# Altium PCB IQ解调器PCB.PcbDoc
Units mil, origin at the board's own origin, x right, y up, seen from the top; angles counter-clockwise.
Board outline 3240 x 3145 mil, 2 copper layers (Top Layer, Bottom Layer); 137 components, 72 nets, 371 pads, 1320 vias.
Unrouted connection lines stored in the file: 2.
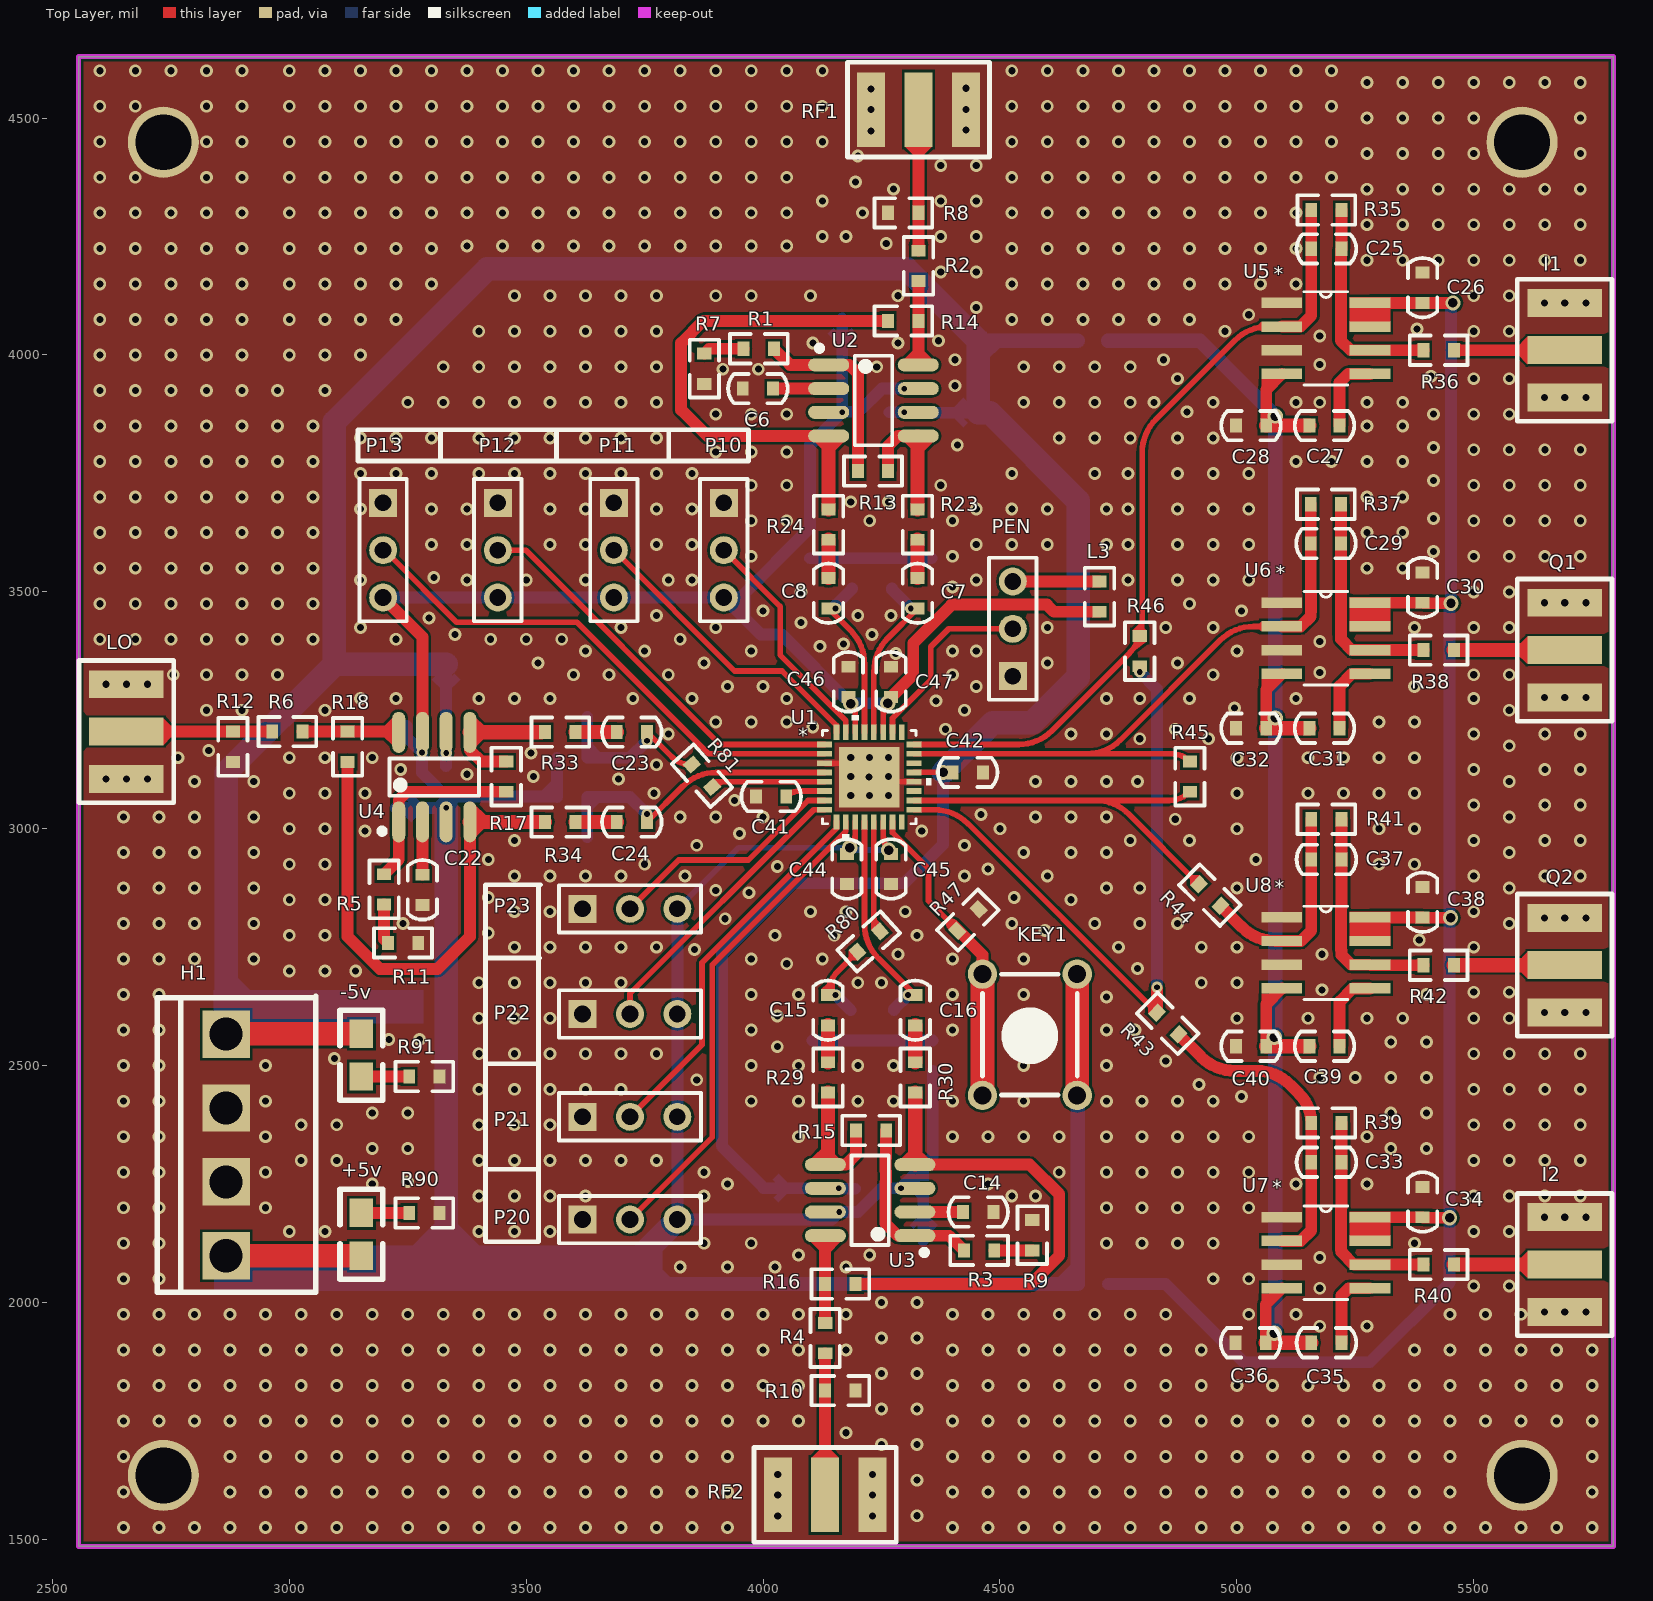
[diagram p0: Top Layer view]
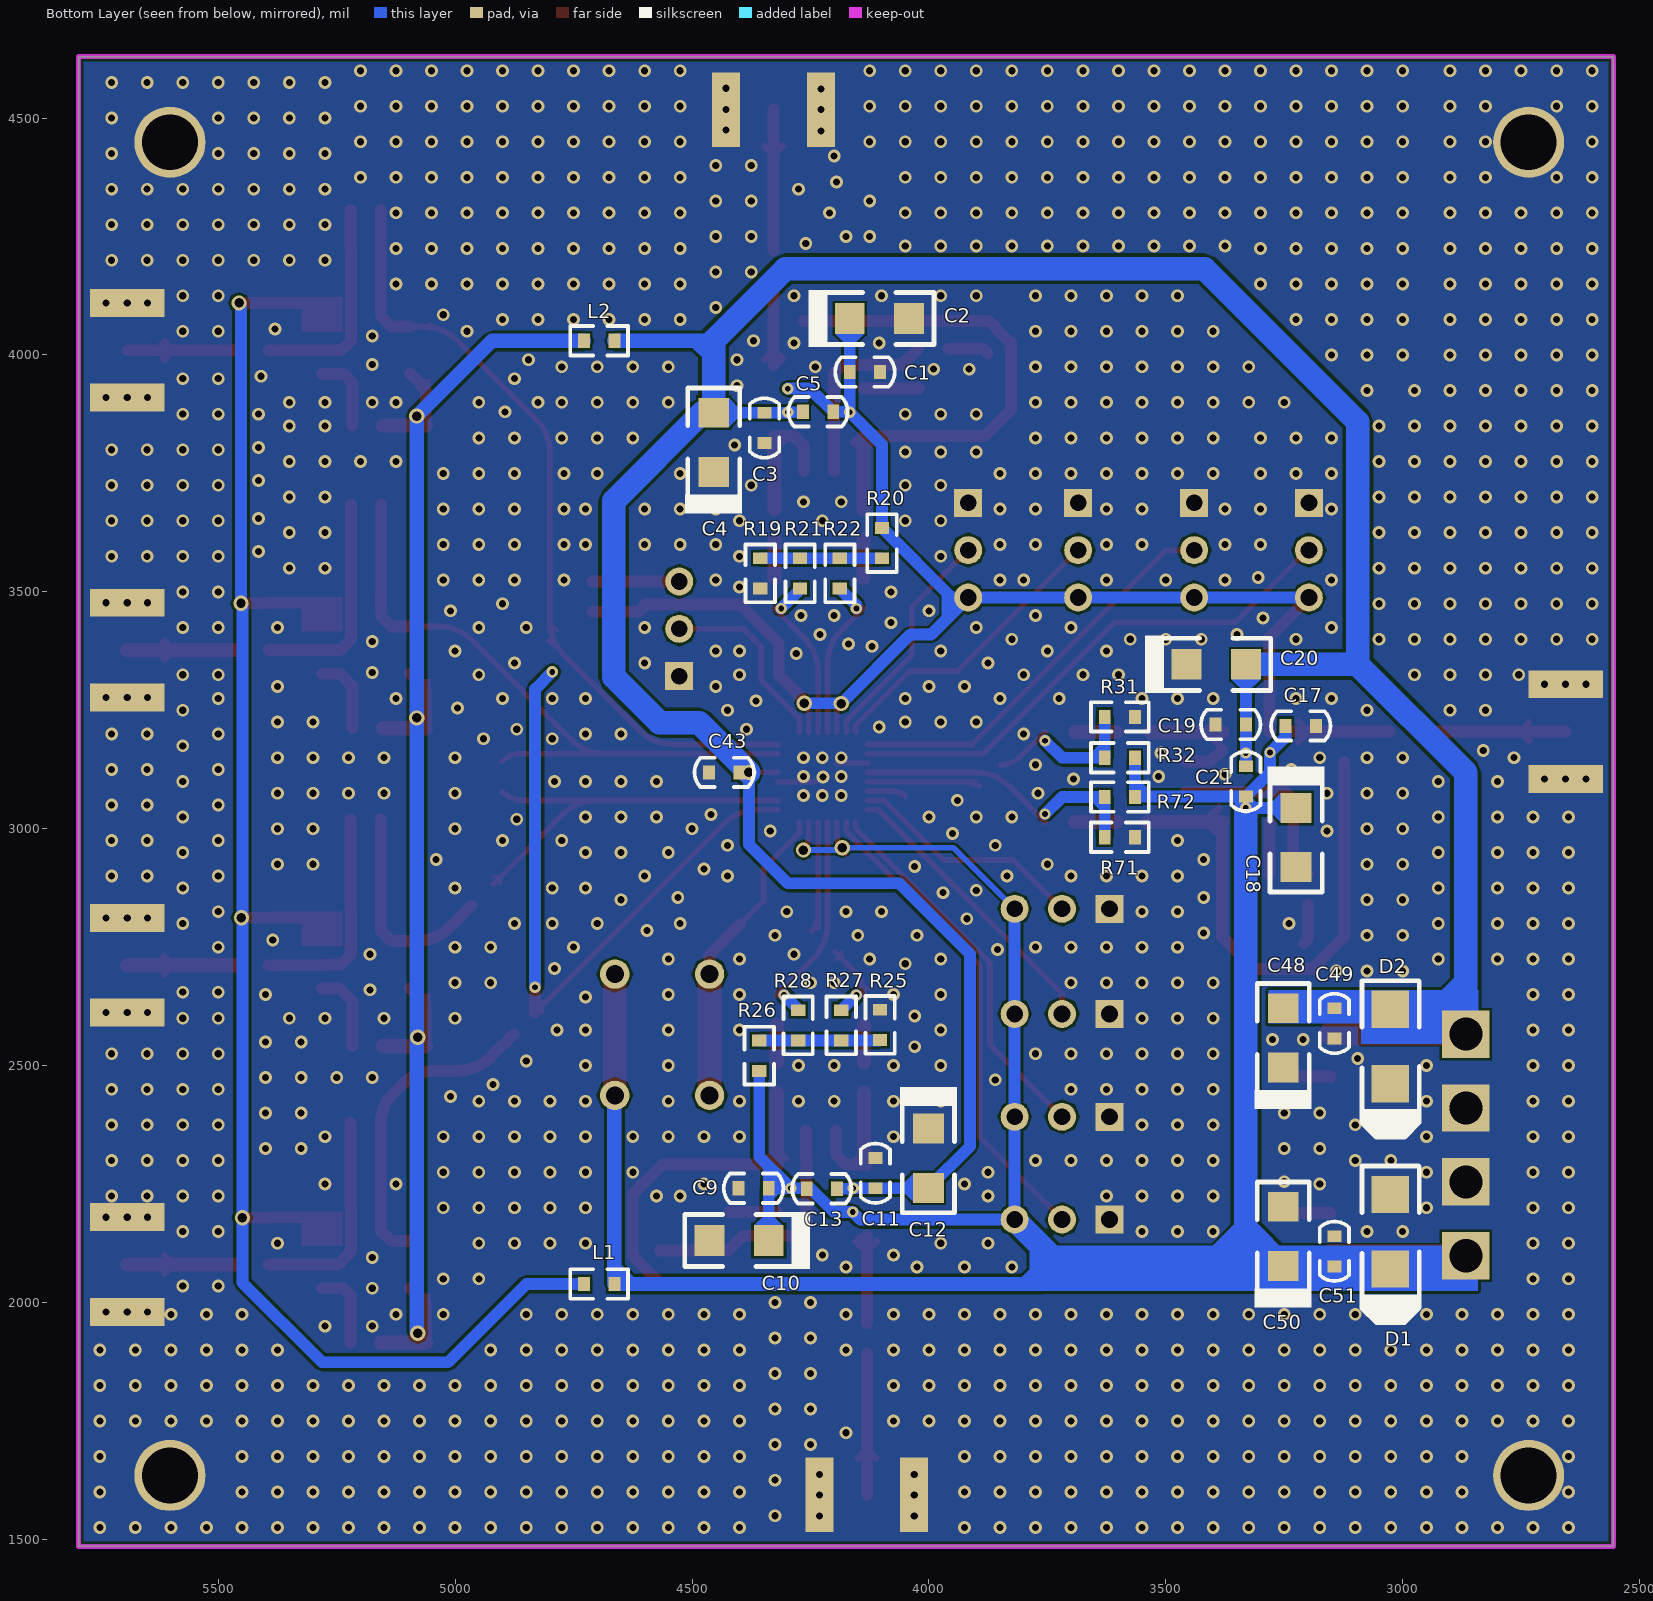
[diagram p1: Bottom Layer view, seen from below]

## Layer stack, top to bottom
Top Solder: solder mask 0.4, Solder Resist, Dk 3.5
Top Layer: signal copper 1.4
Dielectric 1: dielectric 12.6, FR-4, Dk 4.8
Bottom Layer: signal copper 1.4
Bottom Solder: solder mask 0.4, Solder Resist, Dk 3.5

## Board outline
2555,1485 2555,4630 5795,4630 5795,1485

## Design rules (kind name [scope] priority, off if disabled: settings)
Clearance [All] p1: gap=5
PolygonConnect [All] p1: connectstyle=Direct reliefconductorwidth=10 reliefentries=4 polygonreliefangle="90 Angle" airgapwidth=10
RoutingVias [All] p1: holewidth=28 width=50 viastyle="Through Hole" minholewidth=28 minwidth=50 maxholewidth=28 maxwidth=50
SolderMaskExpansion [All] p1: expansion=4
Width [All] p1: maxlimit=60 minlimit=6 preferedwidth=10
30 further rules are at their usual default settings.

## Components (designator, comment, footprint, x,y, rotation, side; value= is the part's Value field where it differs from the comment)
+5v "LED" 0805 3152,2099 r90 top
-5v "LED" 0805 3152,2477 r90 top
C1 "Cap" 0603C 4103,3964 r0 bottom
C2 "10uf" 3216C-TYPE_A 4167,4077 r0 bottom
C3 "Cap" 0603C 4347,3878 r270 bottom
C4 "10uf" 3216C-TYPE_A 4454,3753 r270 bottom
C5 "Cap" 0603C 4266,3880 r180 bottom
C6 "Cap" 0603C 3957,3929 r0 top
C7 "Cap" 0603C 4326,3529 r270 top
C8 "Cap" 0603C 4138,3529 r270 top
C9 "Cap" 0603C 4402,2241 r180 bottom
C10 "10uf" 3216C-TYPE_A 4338,2131 r180 bottom
C11 "Cap" 0603C 4113,2241 r90 bottom
C12 "10uf" 3216C-TYPE_A 4001,2367 r90 bottom
C13 "Cap" 0603C 4194,2240 r0 bottom
C14 "Cap" 0603C 4486,2191 r180 top
C15 "Cap" 0603C 4137,2585 r90 top
C16 "Cap" 0603C 4321,2585 r90 top
C17 "Cap" 0603C 3183,3217 r0 bottom
C18 "10uf" 3216C-TYPE_A 3225,3044 r90 bottom
C19 "Cap" 0603C 3331,3220 r0 bottom
C20 "10uf" 3216C-TYPE_A 3456,3347 r0 bottom
C21 "Cap" 0603C 3331,3132 r270 bottom
C22 "Cap" 0603C 3281,2839 r90 top
C23 "Cap" 0603C 3691,3204 r0 top
C24 "Cap" 0603C 3691,3014 r0 top
C25 "Cap" 0603C 5157,4224 r0 top
C26 "Cap" 0603C 5392,4174 r270 top
C27 "Cap" 0603C 5217,3851 r180 top
C28 "Cap" 0603C 4998,3851 r0 top
C29 "Cap" 0603C 5156,3602 r0 top
C30 "Cap" 0603C 5392,3541 r270 top
C31 "Cap" 0603C 5217,3212 r180 top
C32 "Cap" 0603C 4998,3212 r0 top
C33 "Cap" 0603C 5157,2296 r0 top
C34 "Cap" 0603C 5392,2244 r270 top
C35 "Cap" 0603C 5221,1915 r180 top
C36 "Cap" 0603C 4997,1915 r0 top
C37 "Cap" 0603C 5157,2935 r0 top
C38 "Cap" 0603C 5392,2877 r270 top
C39 "Cap" 0603C 5217,2541 r180 top
C40 "Cap" 0603C 4998,2541 r0 top
C41 "Cap" 0603C 3985,3068 r0 top
C42 "Cap" 0603C 4400,3119 r0 top
C43 "Cap" 0603C 4400,3119 r0 bottom
C44 "Cap" 0603C 4177,2883 r90 top
C45 "Cap" 0603C 4270,2883 r90 top
C46 "Cap" 0603C 4180,3342 r270 top
C47 "Cap" 0603C 4270,3342 r270 top
C48 "10uf" 3216C-TYPE_A 3252,2496 r270 bottom
C49 "Cap" 0603C 3144,2557 r90 bottom
C50 "10uf" 3216C-TYPE_A 3252,2077 r270 bottom
C51 "Cap" 0603C 3144,2076 r90 bottom
D1 "5.6V" SMA/DO-214AC 3026,2228 r270 bottom
D2 "5.6V" SMA/DO-214AC 3026,2619 r270 bottom
H1 "VH3.96-4A" VH3.96-4P 2721,2022 r90 top
I1 "SMA" SMA-2 5692,4010 r90 top
I2 "SMA" SMA-2 5692,2080 r90 top
KEY1 "KEY_M" KEY_M 4663,2693 r270 top
L1 "120nH" 0603R 4696,2039 r0 bottom
L2 "120nH" 0603R 4696,4030 r0 bottom
L3 "120nH" 0603R 4710,3490 r270 top
LO "SMA" SMA-2 2656,3205 r270 top
P10 "Header 3" HDR3X1_A 3917,3688 r270 top
P11 "Header 3" HDR3X1_A 3685,3688 r270 top
P12 "Header 3" HDR3X1_A 3440,3688 r270 top
P13 "Header 3" HDR3X1_A 3198,3688 r270 top
P20 "Header 3" HDR3X1_A 3619,2175 r0 top
P21 "Header 3" HDR3X1_A 3619,2392 r0 top
P22 "Header 3" HDR3X1_A 3619,2609 r0 top
P23 "Header 3" HDR3X1_A 3619,2831 r0 top
PEN "Header 3" HDR3X1_A 4527,3322 r90 top
Q1 "SMA" SMA-2 5692,3377 r90 top
Q2 "SMA" SMA-2 5692,2712 r90 top
R1 "Res1" 0603R 3991,4013 r0 top
R2 "Res1" 0603R 4328,4188 r270 top
R3 "Res1" 0603R 4455.84,2110 r180 top
R4 "Res1" 0603R 4131,1925 r90 top
R5 "Res1" 0603R 3200,2872 r90 top
R6 "Res1" 0603R 2996,3205 r0 top
R7 "Res1" 0603R 3876,3971 r270 top
R8 "Res1" 0603R 4296,4300 r0 top
R9 "Res1" 0603R 4568,2142 r90 top
R10 "Res1" 0603R 4163,1814 r180 top
R11 "Res1" 0603R 3240,2759 r0 top
R12 "Res1" 0603R 2881,3173 r90 top
R13 "Res1" 0603R 4232,3755 r0 top
R14 "Res1" 0603R 4296,4072 r180 top
R15 "Res1" 0603R 4228,2363 r180 top
R16 "Res1" 0603R 4163,2039 r0 top
R17 "Res1" 0603R 3458,3110 r90 top
R18 "Res1" 0603R 3123,3173 r270 top
R19 "Res1" 0603R 4356,3539 r270 bottom
R20 "Res1" 0603R 4099,3603 r270 bottom
R21 "Res1" 0603R 4272,3539 r90 bottom
R22 "Res1" 0603R 4188,3539 r270 bottom
R23 "(DNM)" 0603R 4326,3642 r270 top
R24 "(DNM)" 0603R 4138,3642 r270 top
R25 "Res1" 0603R 4103,2586 r90 bottom
R26 "Res1" 0603R 4358,2521 r90 bottom
R27 "Res1" 0603R 4185,2585 r270 bottom
R28 "Res1" 0603R 4276,2585 r90 bottom
R29 "(DNM)" 0603R 4137,2475 r90 top
R30 "(DNM)" 0603R 4321,2475 r90 top
R31 "Res1" 0603R 3597,3236 r180 bottom
R32 "Res1" 0603R 3597,3150 r0 bottom
R33 "(DNM)" 0603R 3572,3204 r0 top
R34 "(DNM)" 0603R 3572,3014 r0 top
R35 "Res1" 0603R 5189,4306 r0 top
R36 "Res1" 0603R 5426,4010 r0 top
R37 "Res1" 0603R 5188,3685 r0 top
R38 "Res1" 0603R 5426,3377 r0 top
R39 "Res1" 0603R 5189,2379 r0 top
R40 "Res1" 0603R 5426,2080 r0 top
R41 "Res1" 0603R 5189,3020 r0 top
R42 "Res1" 0603R 5426,2712 r0 top
R43 "Res1" 0603R 4854,2589 r315 top
R44 "Res1" 0603R 4943,2860 r315 top
R45 "Res1" 0603R 4901,3110 r270 top
R46 "Res1" 0603R 4795,3375 r270 top
R47 "Res1" 0603R 4432.37,2807.37 r225 top
R71 "Res1" 0603R 3597,2982 r180 bottom
R72 "Res1" 0603R 3597,3067 r0 bottom
R80 "Comment" 0603R 4223,2762 r42 top
R81 "Comment" 0603R 3871,3112 r132 top
R90 "Res1" 0603R 3285,2189 r180 top
R91 "Res1" 0603R 3285,2477 r180 top
RF1 "SMA" SMA-2 4328,4518 r180 top
RF2 "SMA" SMA-2 4131,1594 r0 top
U1 "AD8333ACPZ_REEL" CP_32_2 4224,3109 r0 top
U2 "LMH6552_NGS_8" LC-SOIC-8_150mil 4233,3904 r270 top
U3 "LMH6552_NGS_8" LC-SOIC-8_150mil 4226,2216 r90 top
U4 "LMH6552_NGS_8" LC-SOIC-8_150mil 3306,3109 r0 top
U5 "AD8021AR" R_8 5188,4035 r0 top
U6 "AD8021AR" R_8 5188,3402 r0 top
U7 "AD8021AR" R_8 5188,2105 r0 top
U8 "AD8021AR" R_8 5188,2738 r0 top

## Footprints (in the part's own frame and the unit in brackets; to place one, negate y for a bottom-side part, rotate by r counter-clockwise, add the part's x,y. Pads: shape width x height; smd on the part's side, far side on the other; paste and mask are expansions set on the pad)
0603C [mil]
  rect 25x30 smd: 1(0,0) 2(64,0)
  silkscreen extent -31,-31 95,31
0603R [mil]
  rect 25x30 smd: 1(-32,0) 2(32,0)
  silkscreen extent -61,-31 61,31
0805 [mil]
  rect 60x50 smd: 1(0,0) 2(90,0)
  silkscreen extent -50,-45 140,45
3216C-TYPE_A [mm]
  rect 1.6x1.65 smd: 1(0,0) 2(-3.175,0)
  silkscreen extent -4.51,-1.54 2.22,1.52
CP_32_2 [mil]
  rect 32x12 smd mask+5: 1(-94.5,68.9) 2(-94.5,49.21) 3(-94.5,29.53) 4(-94.5,9.84) 5(-94.5,-9.84) 6(-94.5,-29.53) 7(-94.5,-49.21) 8(-94.5,-68.9) 17(94.5,-68.9) 18(94.5,-49.21) 19(94.5,-29.53) 20(94.5,-9.84) 21(94.5,9.84) 22(94.5,29.53) 23(94.5,49.21) 24(94.5,68.9)
  rect 12x32 smd mask+5: 9(-68.9,-94.5) 10(-49.21,-94.5) 11(-29.53,-94.5) 12(-9.84,-94.5) 13(9.84,-94.5) 14(29.53,-94.5) 15(49.21,-94.5) 16(68.9,-94.5) 25(68.9,94.5) 26(49.21,94.5) 27(29.53,94.5) 28(9.84,94.5) 29(-9.84,94.5) 30(-29.53,94.5) 31(-49.21,94.5) 32(-68.9,94.5)
  rect 128x128 smd mask-63.5: 33(0,0)
  silkscreen extent -98,-130 130,130, body extent -100,-100 100,100, height 38
HDR3X1_A [mm] "Connector; Header; 3 Position"
  rect 1.5x1.5 hole 0.9: 1(0,0)
  round 1.5 hole 0.9: 2(2.54,0) 3(5.08,0)
  silkscreen extent -1.27,-1.27 6.35,1.27
KEY_M [mil]
  round 62 hole 38: 1(0,0) 1(255.91,0) 2(0,-200) 2(255.91,-200)
  silkscreen extent 0,-200 255,0
LC-SOIC-8_150mil [mm]
  oval 0.7x2.2 smd: 1(-1.905,-2.4) 2(-0.635,-2.4) 3(0.635,-2.4) 4(1.905,-2.4) 5(1.905,2.4) 6(0.635,2.4) 7(-0.635,2.4) 8(-1.905,2.4)
  silkscreen extent -2.95,-3.05 2.4,1
R_8 [mil]
  rect 86x22 smd: 1(-93,75) 2(-93,25) 3(-93,-25) 4(-93,-75) 5(93,-75) 6(93,-25) 7(93,25) 8(93,75)
  silkscreen extent -46,-98 46,98, body extent -122,-98 122,98, height 69
SMA-2 [mm]
  rect 1.5x4 smd: 1(0,0)
  rect 1.5x4 all layers, no hole: 2(2.54,0) 3(-2.54,0)
  silkscreen extent -3.81,-2.54 3.81,2.54, body extent -3,-11.89 3,1.71, height 3.2
SMA/DO-214AC [mm]
  rect 2x2 smd: 1(0,0) 2(4,0)
  silkscreen extent -1.52,-1.52 6.86,1.55
VH3.96-4P [mm]
  rect 2.54x2.54 hole 1.778: 1(1.95,-3.7) 2(5.91,-3.7) 3(9.87,-3.7) 4(13.83,-3.7)
  silkscreen extent 0,-8.5 15.87,0

## Part data
C1 C3 C5 C6 C7 C8 C9 C11 C13 C14 C15 C16 C17 C19 C21 C22 C23 C24 C25 C26 C27 C28 C29 C30 C31 C32 C33 C34 C35 C36 C37 C38 C39 C40 C41 C42 C43 C44 C45 C46 C47 C49 C51: "无极性电容"
C2 C4 C10 C12 C18 C20 C48 C50: library part 钽电容Type-A
D1 D2: library part 肖特基-5.6V
I1 I2 LO Q1 Q2 RF1 RF2: library part SMA-2
L1 L2 L3: library part 0603电感, "0603电感"
P10 P11 P12 P13 P20 P21 P22 P23 PEN: "接插件"
R1 R2 R3 R4 R5 R6 R7 R8 R9 R10 R11 R12 R13 R14 R15 R16 R17 R18 R19 R20 R21 R22 R25 R26 R27 R28 R31 R32 R35 R36 R37 R38 R39 R40 R41 R42 R43 R44 R45 R46 R47 R71 R72 R90 R91: "贴片电阻"
R23 R24 R29 R30 R33 R34: library part Res1, "贴片电阻"
U1 U2 U3 U4 U5 U6 U7 U8: "Imported"

## Free pads (board coordinates)
  round 150 hole 118.11: 0(5602,1635) 1(5602,4449) 2(2734,1635) 3(2734,4449)

## Via types
v1: diameter 27, hole 15, Top Layer to Bottom Layer, 1290 vias
v2: diameter 24, hole 12, Top Layer to Bottom Layer, 17 vias
v3: diameter 32, hole 20, Top Layer to Bottom Layer, 13 vias

## Nets (pads, with @x,y where several pads share a name; then routed paths per layer and width w, separated by ;. In a path a pad name is that pad's centre, name@x,y a point inside that pad or via, vN(x,y) a via of type N, cw(c..) or ccw(c..) an arc to the next point about the centre after c; other vN are vias at no path point)
4LON: C23.2 R31.1 R32.2 R81.1 R81.2 U1.5 | length 585
  Top Layer w12: C23.2 3807.4,3151.6 ccw(c3848.37,3192.57) R81.2@3848.37,3134.63 ; R81.1@3893.63,3089.37 cw(c3917.25,3065.75) 3917.25,3099.16 U1.5
  Bottom Layer w25: R31.1 R32.2 3719,3150 v2(3755,3186)
4LOP: C24.2 R71.1 R72.2 U1.4 | length 639.5
  Top Layer w12: C24.2 3830.55,3089.55 cw(c3901.26,3018.84) 3901.26,3118.84 U1.4
  Bottom Layer w25: R71.1 R72.2 3719,3067 v2(3755,3031)
+5V: +5v.1 C1.2 C2.1 C5.2 C9.2 C10.1 C13.2 C17.2 C18.1 C21.2 C44.2 C45.2 C46.2 C47.2 C50.1 C51.1 D1.2 H1.1 KEY1.1 L1.1 L3.2 P10.3 P11.3 P12.3 P13.3 P20.3 P21.3 P22.3 P23.3 R20.1 R26.1 R32.1 R72.1 U1.11 U1.14 U1.27 U1.30 U2.3 U2.7 U3.3 U3.7 U4.3 U4.7 | length 9827
  Top Layer w12: C44.2 ccw(c4134.82,2989.18) 4194.47,2989.18 U1.11 ; C46.2 cw(c4145.06,3243.06) 4194.47,3243.06 U1.30 ; U1.14 4253.53,2986.77 ccw(c4309.77,2986.77) C45.2 ; U1.27 4253.53,3238.23 cw(c4309.77,3238.23) C47.2
  Top Layer w25: P13.3 3281,3405 U4.7 ; C47.2 4317,3325 4317,3392 4398,3473 4599,3473 4614,3458 L3.2
  Top Layer w50: H1.1@2866.9,2099 +5v.1 ; KEY1.1@4663,2437.09 KEY1.1@4663,2693
  Bottom Layer w12: P23.3 3948,2960 v3(4183,2960) 4188,2955 v3(4265,2955)
  Bottom Layer w25: D1.2 3031.48,2076 C51.1 C50.1@3251,2076 ; P13.3 P12.3 P11.3 P10.3 ; C18.1 v2(3331,3044) C21.2 ; C17.2 3247,3194 v2(3280,3161) 3280,3119 C21.2 ; R72.1@3564,3068 C21.2 ; R72.1 R32.1 ; P23.3 P22.3 P21.3 P20.3 4145,2175 v2(4161,2191) 4200,2191 4249,2240 C13.2 ; C2.1 C1.2 v2(4167,3879) 4099,3811 R20.1 3952,3488 P10.3 ; v2@4168,3880 C5.2 4251,3929 v2(4298,3929) ; v3(4185,3264) 4039,3410 3995,3410 P10.3 ; v3@4186,3265 v3(4263,3265) ; C13.2@4259,2241 v2(4291,2241) ; C10.1 C9.2 v2(4291,2241) ; R26.1 4358,2308 v2(4291,2241)
  Bottom Layer w30: 3721,2077 3759,2039 L1.1 KEY1.1@4664,2436.09
  Bottom Layer w50: H1.1 2894.92,2070.52 D1.2 ; v2(3331,3044) 3331,2156 C50.1 3721,2077 P20.3
+5VS: C26.2 C30.2 C34.2 C38.2 L1.2 U5.7 U5.8 U6.7 U6.8 U7.7 U7.8 U8.7 U8.8 | length 3606.6
  Top Layer w25: U7.8 C34.2 ; U8.8 C38.2 ; U6.8 C30.2 ; U5.8 C26.2 v3(5456,4110) ; C34.2@5393,2179 v3(5449,2179) ; C38.2@5393,2812 v3(5451,2812) ; C30.2@5393,3476 v3(5452,3476)
  Bottom Layer w25: L1.2 4850,2039 5015,1874 5281,1874 5449,2042 v3(5449,2179) v3@5449,3473 ; v3(5452,3476) 5452,4106 v3(5456,4110)
-5V: -5v.2 C3.1 C4.2 C5.1 C11.1 C12.2 C13.1 C19.1 C20.2 C21.1 C42.1 C43.1 C48.2 C49.2 D2.1 H1.4 L2.1 U1.21 U2.6 U3.6 U4.6 | length 7157.9
  Top Layer w12: U1.21@4318.66,3119 v3(4380,3119)
  Top Layer w50: H1.4@2867.18,2567 -5v.2
  Bottom Layer w25: D2.1@3028,2621 C49.2 C48.2 ; C21.1 v2(3331,3160) C19.1 C20.2 ; v2(4160,2241) C11.1 4002,2241 C12.2 3913,2330 3913,2735 4063,2885 4298,2885 4380,2967 v3(4380,3119) ; v2@4161,2240 C13.1 ; C5.1@4267,3879 v2(4298,3879) ; v2@4299,3878 C3.1 C4.2
  Bottom Layer w30: 4455,4030 L2.1
  Bottom Layer w50: D2.1 2919.18,2619 H1.4 2866.67,3118.67 3095,3347 ; C20.2 3095,3347 ; v3(4380,3119) 4485,3224 4569,3224 4665,3320 4665,3692 4479,3878 C4.2 4454,4031 4303,4182 3418,4182 3095,3859 3095,3347
-5VS: C27.2 C28.2 C31.2 C32.2 C35.2 C36.2 C39.2 C40.2 L2.2 U5.4 U6.4 U7.4 U8.4 | length 3238
  Top Layer w25: C36.2 5061,1996 U7.4 ; C40.2 5062,2630 U8.4 ; C32.2 5062,3294 U6.4 ; C28.2 5062,3927 U5.4
  Top Layer w30: C36.2 C35.2 ; C40.2 C39.2 ; C32.2 C31.2 ; C28.2 C27.2
  Bottom Layer w30: L2.2 4922,4030 v3(5081,3871) v3(5081,3234) v3@5081,1937
  other v3: 5079,1935 5079,2560
ENBL: PEN.2 U1.26 | length 402.7
  Top Layer w12: U1.26 4273.21,3233.21 4354,3314 4354,3384 4392,3422 PEN.2
GND: C1.1 C2.2 C3.2 C4.1 C6.1 C9.1 C10.2 C11.2 C12.1 C14.1 C17.1 C18.2 C19.2 C20.1 C22.1 C26.1 C28.1 C30.1 C32.1 C34.1 C36.1 C38.1 C40.1 C41.1 C42.2 C43.2 C44.1 C45.1 C46.1 C47.1 C48.1 C49.1 C50.2 C51.2 D1.1 D2.2 H1.2 H1.3 I1.2 I1.3 I2.2 I2.3 LO.2 LO.3 P10.1 P11.1 P12.1 P13.1 P20.1 P21.1 P22.1 P23.1 pad.0 pad.1 pad.2 pad.3 PEN.1 Q1.2 Q1.3 Q2.2 Q2.3 R7.2 R8.1 R9.2 R10.1 R11.2 R12.1 R19.2 R25.2 R31.2 R47.1 R71.2 R90.1 R91.1 RF1.2 RF1.3 RF2.2 RF2.3 U1.3 U1.20 U1.33 U5.1 U5.3 U6.1 U6.3 U7.1 U7.3 U8.1 U8.3 | length 162.4
  Top Layer w12: U1.3 U1.33@4194.47,3138.53 ; v1(4223.76,3109.24) U1.33 ccw(c4247.76,3132.76) 4247.76,3099.16 U1.20
  other v1: 2650,1525 2725,1525 2800,1525 2875,1525 2950,1525 3025,1525 3100,1525 3175,1525 3250,1525 3325,1525 3400,1525 3475,1525 3550,1525 3625,1525 3700,1525 3775,1525 3850,1525 3925,1525 4400,1525 4475,1525 4550,1525 4625,1525 4700,1525 4775,1525 4850,1525 4925,1525 5000,1525 5075,1525 5150,1525 5225,1525 5300,1525 5375,1525 5450,1525 5525,1525 5600,1525 5675,1525 5750,1525 4031,1549 4231,1549 4325,1550 4031,1594 4231,1594 2650,1600 2875,1600 2950,1600 3025,1600 3100,1600 3175,1600 3250,1600 3325,1600 3400,1600 3475,1600 3550,1600 3625,1600 3700,1600 3775,1600 3850,1600 3925,1600 4400,1600 4475,1600 4550,1600 4625,1600 4700,1600 4775,1600 4850,1600 4925,1600 5000,1600 5075,1600 5150,1600 5225,1600 5300,1600 5375,1600 5450,1600 5750,1600 4325,1625 4031,1637 4231,1637 2650,1675 2875,1675 2950,1675 3025,1675 3100,1675 3175,1675 3250,1675 3325,1675 3400,1675 3475,1675 3550,1675 3625,1675 3700,1675 3775,1675 3850,1675 3925,1675 4400,1675 4475,1675 4550,1675 4625,1675 4700,1675 4775,1675 4850,1675 4925,1675 5000,1675 5075,1675 5150,1675 5225,1675 5300,1675 5375,1675 5450,1675 5750,1675 4250,1700 4325,1700 4175,1725 2650,1750 2725,1750 2800,1750 2875,1750 2950,1750 3025,1750 3100,1750 3175,1750 3250,1750 3325,1750 3400,1750 3475,1750 3550,1750 3625,1750 3700,1750 3775,1750 3850,1750 3925,1750 4000,1750 4075,1750 4400,1750 4475,1750 4550,1750 4625,1750 4700,1750 4775,1750 4850,1750 4925,1750 5000,1750 5075,1750 5150,1750 5225,1750 5300,1750 5375,1750 5450,1750 5525,1750 5600,1750 5675,1750 5750,1750 4250,1775 4325,1775 2650,1825 2725,1825 2800,1825 2875,1825 2950,1825 3025,1825 3100,1825 3175,1825 3250,1825 3325,1825 3400,1825 3475,1825 3550,1825 3625,1825 3700,1825 3775,1825 3850,1825 3925,1825 4000,1825 4075,1825 4400,1825 4475,1825 4550,1825 4625,1825 4700,1825 4775,1825 4850,1825 4925,1825 5000,1825 5075,1825 5150,1825 5225,1825 5300,1825 5375,1825 5450,1825 5525,1825 5600,1825 5675,1825 5750,1825 4250,1850 4325,1850 2650,1900 2725,1900 2800,1900 2875,1900 2950,1900 3025,1900 3100,1900 3175,1900 3250,1900 3325,1900 3400,1900 3475,1900 3550,1900 3625,1900 3700,1900 3775,1900 3850,1900 3925,1900 4000,1900 4075,1900 4175,1900 4400,1900 4475,1900 4550,1900 4625,1900 4700,1900 4775,1900 4850,1900 4925,1900 5375,1900 5450,1900 5525,1900 5600,1900 5675,1900 5750,1900 4250,1925 4325,1925 5175,1950 5275,1950 2650,1975 2725,1975 2800,1975 2875,1975 2950,1975 3025,1975 3100,1975 3175,1975 3250,1975 3325,1975 3400,1975 3475,1975 3550,1975 3625,1975 3700,1975 3775,1975 3850,1975 3925,1975 4000,1975 4075,1975 4175,1975 4400,1975 4475,1975 4550,1975 4625,1975 4700,1975 4775,1975 4850,1975 5025,1975 5125,1975 5450,1975 5525,1975 5600,1975 5649,1980 5692,1980 5737,1980 4250,2000 4325,2000 5175,2030 5500,2035 5575,2035 2650,2050 2725,2050 4950,2050 5025,2050 3825,2075 3925,2075 4025,2075 4175,2075 5175,2095 4075,2100 4225,2100 2650,2125 2725,2125 3875,2125 3975,2125 4725,2125 4800,2125 4875,2125 4950,2125 5375,2125 3000,2150 3075,2150 3400,2150 3475,2150 3550,2150 5500,2150 5575,2150 5649,2180 5692,2180 5737,2180 2650,2200 2725,2200 2950,2200 4725,2200 4800,2200 4875,2200 4950,2200 5025,2200 3400,2225 3475,2225 3550,2225 3625,2225 3875,2225 4525,2225 4575,2225 5500,2225 5575,2225 5650,2225 5725,2225 3175,2250 3925,2250 4475,2250 5125,2250 5275,2250 3250,2255 2650,2275 2725,2275 2950,2275 3875,2275 4625,2275 4725,2275 4800,2275 4875,2275 4950,2275 5025,2275 3025,2300 3100,2300 3400,2300 3475,2300 3550,2300 3625,2300 3700,2300 3775,2300 5500,2300 5575,2300 5650,2300 5725,2300 3175,2325 3250,2325 5325,2325 5400,2325 2650,2350 2725,2350 2950,2350 4075,2350 4400,2350 4475,2350 4550,2350 4625,2350 4725,2350 4800,2350 4875,2350 4950,2350 5025,2350 5275,2350 3025,2375 3100,2375 3400,2375 3475,2375 3550,2375 5500,2375 5575,2375 5650,2375 5725,2375 3175,2400 3250,2400 5325,2400 5400,2400 2650,2425 2725,2425 2950,2425 3975,2425 4075,2425 4200,2425 4275,2425 4400,2425 4550,2425 4725,2425 4800,2425 4875,2425 4950,2425 5010,2435 3400,2450 3475,2450 3550,2450 3625,2450 3700,2450 5500,2450 5575,2450 5650,2450 5725,2450 4920,2460 3860,2470 5175,2475 5250,2475 5325,2475 5400,2475 2650,2500 2725,2500 2950,2500 3975,2500 4075,2500 4200,2500 4275,2500 4550,2500 4725,2500 4850,2510 3095,2515 3400,2525 3475,2525 3550,2525 3625,2525 3700,2525 3775,2525 5500,2525 5575,2525 5650,2525 5725,2525 4030,2540 5325,2550 5400,2550 3210,2555 3275,2555 2650,2575 2725,2575 3975,2575 4400,2575 4550,2575 4725,2575 4785,2575 3400,2600 3475,2600 3550,2600 5000,2600 5150,2600 5275,2600 5350,2600 5500,2600 5575,2600 4030,2605 5649,2612 5692,2612 5737,2612 4725,2645 2650,2650 2725,2650 3975,2650 4075,2650 4400,2650 4550,2650 5400,2650 5500,2655 5575,2655 5180,2660 3400,2675 3475,2675 3550,2675 3625,2675 3700,2675 4200,2675 4250,2675 4925,2675 5000,2675 3000,2700 3075,2700 3140,2700 4790,2705 4050,2715 2650,2725 2725,2725 2800,2725 2925,2725 3975,2725 4125,2725 4400,2725 4550,2725 4285,2735 5180,2735 3855,2745 3475,2750 3550,2750 3625,2750 3700,2750 3775,2750 4750,2750 4925,2750 5000,2750 5500,2750 5385,2765 3000,2775 3075,2775 4025,2775 4150,2775 4325,2775 3420,2780 4595,2785 2650,2800 2725,2800 2800,2800 2925,2800 3240,2800 4525,2800 4700,2800 4795,2800 4875,2800 5575,2800 3920,2810 5649,2812 5692,2812 5737,2812 3475,2825 3550,2825 4100,2825 4175,2825 4300,2825 5500,2825 3000,2850 3075,2850 4650,2850 3420,2855 4530,2855 3970,2865 3900,2870 2650,2875 2725,2875 2800,2875 2925,2875 4725,2875 4795,2875 5000,2875 5575,2875 3475,2900 3550,2900 3625,2900 3700,2900 3835,2900 4425,2900 4600,2900 5500,2900 5650,2900 5725,2900 4475,2915 4030,2920 3000,2925 3075,2925 3750,2925 5300,2925 5375,2925 3420,2935 5040,2935 2650,2950 2725,2950 2800,2950 2925,2950 4550,2950 4650,2950 4725,2950 5575,2950 3860,2965 4425,2965 3475,2975 4775,2975 4900,2975 5500,2975 5650,2975 5725,2975 3950,2990 3160,2995 4335,2995 3000,3000 3075,3000 4500,3000 5000,3000 5300,3000 5375,3000 4870,3020 2650,3025 2725,3025 2800,3025 2925,3025 3825,3025 3900,3025 4000,3025 4575,3025 4650,3025 4725,3025 5575,3025 4460,3030 5500,3050 5650,3050 5725,3050 3940,3060 4185,3070 4225,3070 4265,3070 3000,3075 3075,3075 3160,3075 3770,3075 5000,3075 5150,3075 5225,3075 5300,3075 5375,3075 2800,3100 2925,3100 4575,3100 4650,3100 4725,3100 4790,3100 5575,3100 2613,3105 2656,3105 2701,3105 3695,3105 3515,3110 4185,3110 4265,3110 3375,3115 3235,3125 5500,3125 5650,3125 5725,3125 3775,3135 2765,3150 3000,3150 3075,3150 3175,3150 4185,3150 4225,3150 4265,3150 5000,3150 5150,3150 5225,3150 5300,3150 5375,3150 3510,3160 2830,3165 5575,3175 4795,3190 4940,3190 3800,3200 4650,3200 4725,3200 5500,3200 5650,3200 5725,3200 4385,3210 4870,3210 4105,3215 3900,3225 3975,3225 4050,3225 5300,3225 5375,3225 2825,3250 2900,3250 3075,3250 4425,3250 5575,3250 4995,3255 4365,3270 3150,3275 3225,3275 3400,3275 3475,3275 3550,3275 3725,3275 3850,3275 4050,3275 4725,3275 4795,3275 4900,3275 5125,3275 5500,3275 5649,3277 5692,3277 5737,3277 3925,3300 4000,3300 4450,3300 5375,3300 2613,3305 2656,3305 2701,3305 2755,3325 2825,3325 2900,3325 2975,3325 3600,3325 3675,3325 3800,3325 4400,3325 4950,3325 5500,3325 5575,3325 5175,3330 3525,3350 3875,3350 4600,3350 4875,3350 4280,3370 3625,3375 3750,3375 3975,3375 4400,3375 4450,3375 5000,3375 4120,3385 4170,3390 5175,3395 2600,3400 2675,3400 2750,3400 2825,3400 2900,3400 2975,3400 3050,3400 3225,3400 3425,3400 3500,3400 3575,3400 3825,3400 3350,3410 4230,3410 3150,3425 3700,3425 3900,3425 4600,3425 4850,3425 4950,3425 5375,3425 5500,3425 5575,3425 4080,3435 3295,3445 3775,3450 4200,3450 4270,3450 4000,3460 5010,3460 2600,3475 2675,3475 2750,3475 2825,3475 2900,3475 2975,3475 3050,3475 4900,3475 5649,3477 5692,3477 5737,3477 4080,3500 5500,3500 5575,3500 4400,3510 3150,3525 3375,3525 3500,3525 3625,3525 3800,3525 3850,3525 4450,3525 4770,3525 4875,3525 4950,3525 5025,3525 3305,3530 2600,3550 2675,3550 2750,3550 2825,3550 2900,3550 2975,3550 3050,3550 5275,3550 5350,3550 3975,3575 4400,3575 5500,3575 5575,3575 5650,3575 5725,3575 5415,3585 3300,3600 3375,3600 3550,3600 3625,3600 3775,3600 3850,3600 4450,3600 4525,3600 4600,3600 4725,3600 4770,3600 4875,3600 4950,3600 5025,3600 2600,3625 2675,3625 2750,3625 2825,3625 2900,3625 2975,3625 3050,3625 5275,3625 5350,3625 3975,3650 4050,3650 4225,3650 4400,3650 5500,3650 5575,3650 5650,3650 5725,3650 5415,3655 3150,3675 3300,3675 3375,3675 3550,3675 3625,3675 3775,3675 3850,3675 4450,3675 4525,3675 4600,3675 4725,3675 4770,3675 4875,3675 4950,3675 5025,3675 4185,3690 4265,3690 2600,3700 2675,3700 2750,3700 2825,3700 2900,3700 2975,3700 3050,3700 5275,3700 5350,3700 3975,3725 4050,3725 4375,3725 5500,3725 5575,3725 5650,3725 5725,3725 5415,3735 3150,3750 3225,3750 3300,3750 3400,3750 3475,3750 3550,3750 3625,3750 3700,3750 3775,3750 3850,3750 4525,3750 4700,3750 4770,3750 4875,3750 4950,3750 5025,3750 2600,3775 2675,3775 2750,3775 2825,3775 2900,3775 2975,3775 3050,3775 5125,3775 5200,3775 5275,3775 5350,3775 3900,3795 3975,3795 4050,3795 5500,3800 5575,3800 5650,3800 5725,3800 5415,3805 4410,3810 3150,3825 3225,3825 3300,3825 3400,3825 3475,3825 3550,3825 3625,3825 3700,3825 3775,3825 4625,3825 4700,3825 4775,3825 4875,3825 4950,3825 2600,3850 2675,3850 2750,3850 2825,3850 2900,3850 2975,3850 3050,3850 5275,3850 5350,3850 3900,3875 3975,3875 4050,3875 5415,3875 5500,3875 5575,3875 4895,3880 3250,3900 3325,3900 3400,3900 3475,3900 3550,3900 3625,3900 3700,3900 3775,3900 4550,3900 4625,3900 4700,3900 4775,3900 4825,3900 4950,3900 5125,3900 5175,3900 5275,3900 5350,3900 5649,3910 5692,3910 5737,3910 2600,3925 2675,3925 2750,3925 2825,3925 2900,3925 2975,3925 3075,3925 4405,3935 4875,3950 5500,3950 5575,3950 5410,3955 3915,3970 3990,3970 3325,3975 3400,3975 3475,3975 3550,3975 3625,3975 3700,3975 3775,3975 4240,3975 4550,3975 4625,3975 4700,3975 4775,3975 5175,3980 4405,3990 4845,3990 2600,4000 2675,4000 2750,4000 2825,4000 2900,4000 3000,4000 3075,4000 3150,4000 4105,4025 4285,4025 4370,4030 5175,4040 3400,4050 3475,4050 3550,4050 3625,4050 3700,4050 3775,4050 4975,4050 5500,4050 5575,4050 5380,4055 2600,4075 2675,4075 2750,4075 2825,4075 2900,4075 3000,4075 3075,4075 3150,4075 3225,4075 4525,4075 4600,4075 4675,4075 4750,4075 4825,4075 4900,4075 5025,4085 4450,4100 5649,4110 5692,4110 5737,4110 3475,4125 3550,4125 3625,4125 3700,4125 3775,4125 3900,4125 3975,4125 4100,4125 4285,4125 5500,4125 5575,4125 2600,4150 2675,4150 2750,4150 2825,4150 2900,4150 3000,4150 3075,4150 3150,4150 3225,4150 3300,4150 4525,4150 4600,4150 4675,4150 4750,4150 4825,4150 4900,4150 4975,4150 5050,4150 5125,4150 4375,4175 4450,4175 5275,4200 5350,4200 5425,4200 5500,4200 5575,4200 5650,4200 5725,4200 2600,4225 2675,4225 2750,4225 2825,4225 2900,4225 3000,4225 3075,4225 3150,4225 3225,4225 3300,4225 4525,4225 4600,4225 4675,4225 4750,4225 4825,4225 4900,4225 4975,4225 5050,4225 5125,4225 3375,4230 3450,4230 3525,4230 3600,4230 3675,4230 3750,4230 3825,4230 3900,4230 3975,4230 4050,4230 4260,4235 4125,4250 4175,4250 4375,4250 4450,4250 5275,4275 5350,4275 5425,4275 5500,4275 5575,4275 5650,4275 5725,4275 2600,4300 2675,4300 2750,4300 2825,4300 2900,4300 3000,4300 3075,4300 3150,4300 3225,4300 3300,4300 3375,4300 3450,4300 3525,4300 3600,4300 3675,4300 3750,4300 3825,4300 3900,4300 3975,4300 4050,4300 4210,4300 4525,4300 4600,4300 4675,4300 4750,4300 4825,4300 4900,4300 4975,4300 5050,4300 5125,4300 4125,4325 4375,4325 4450,4325 4275,4350 5275,4350 5350,4350 5425,4350 5500,4350 5575,4350 5650,4350 5725,4350 4195,4365 2600,4375 2675,4375 2825,4375 2900,4375 3000,4375 3075,4375 3150,4375 3225,4375 3300,4375 3375,4375 3450,4375 3525,4375 3600,4375 3675,4375 3750,4375 3825,4375 3900,4375 3975,4375 4050,4375 4525,4375 4600,4375 4675,4375 4750,4375 4825,4375 4900,4375 4975,4375 5050,4375 5125,4375 5200,4375 4375,4400 4450,4400 4200,4420 5275,4425 5350,4425 5425,4425 5500,4425 5725,4425 2600,4450 2825,4450 2900,4450 3000,4450 3075,4450 3150,4450 3225,4450 3300,4450 3375,4450 3450,4450 3525,4450 3600,4450 3675,4450 3750,4450 3825,4450 3900,4450 3975,4450 4050,4450 4125,4450 4525,4450 4600,4450 4675,4450 4750,4450 4825,4450 4900,4450 4975,4450 5050,4450 5125,4450 5200,4450 4228,4473 4428,4475 5275,4500 5350,4500 5425,4500 5500,4500 5725,4500 4228,4518 4428,4518 2600,4525 2675,4525 2825,4525 2900,4525 3000,4525 3075,4525 3150,4525 3225,4525 3300,4525 3375,4525 3450,4525 3525,4525 3600,4525 3675,4525 3750,4525 3825,4525 3900,4525 3975,4525 4050,4525 4125,4525 4525,4525 4600,4525 4675,4525 4750,4525 4825,4525 4900,4525 4975,4525 5050,4525 5125,4525 5200,4525 4228,4561 4428,4563 5275,4575 5350,4575 5425,4575 5500,4575 5575,4575 5650,4575 5725,4575 2600,4600 2675,4600 2750,4600 2825,4600 2900,4600 3000,4600 3075,4600 3150,4600 3225,4600 3300,4600 3375,4600 3450,4600 3525,4600 3600,4600 3675,4600 3750,4600 3825,4600 3900,4600 3975,4600 4050,4600 4125,4600 4525,4600 4600,4600 4675,4600 4750,4600 4825,4600 4900,4600 4975,4600 5050,4600 5125,4600 5200,4600
I1PO: C25.1 R35.1 R46.1 U1.24 U5.2 | length 1675.8
  Top Layer w12: U1.24 4539.48,3177.9 ccw(c4539.48,3277.9) 4610.19,3207.19 4770.71,3367.71 ccw(c4700,3438.42) 4800,3438.42 4800,3793.58 cw(c4900,3793.58) 4829.29,3864.29 4995.71,4030.71 cw(c5066.42,3960) 5066.42,4060 U5.2
  Top Layer w25: U5.2 5134,4060 5157,4083 C25.1 R35.1
I2PO: R43.1 R46.2 U1.17 | length 1424.9
  Top Layer w12: U1.17 4361.48,3040.1 cw(c4361.48,2940.1) 4432.19,3010.81 R43.1 ; v2@4831.37,2663.07 cw(c4836.93,2663.07) 4833,2667 v2(4831.37,2665.37)
  Top Layer w25: R43.1 v2@4831.37,2663.07
  Bottom Layer w25: v2(4795,3331) 4831.37,3294.63 v2(4831.37,2665.37)
Net+5v_2: +5v.2 R90.2 | length 101
  Top Layer w25: +5v.2 R90.2
Net-5v_1: -5v.1 R91.2 | length 101
  Top Layer w25: -5v.1 R91.2
NetC6_2: C6.2 U2.2 | length 117.5
  Top Layer w25: C6.2 U2.2
NetC7_1: C7.1 R23.2 | length 81
  Top Layer w30: C7.1 R23.2
NetC8_1: C8.1 R24.2 | length 81
  Top Layer w30: C8.1 R24.2
NetC14_2: C14.2 U3.2 | length 101.5
  Top Layer w25: U3.2 C14.2
NetC15_1: C15.1 R29.2 | length 78
  Top Layer w30: R29.2 C15.1
NetC16_1: C16.1 R30.2 | length 78
  Top Layer w30: R30.2 C16.1
NetC22_2: C22.2 U4.2 | length 111.5
  Top Layer w25: C22.2 U4.2
NetC23_1: C23.1 R33.2 | length 87
  Top Layer w30: R33.2 C23.1
NetC24_1: C24.1 R34.2 | length 87
  Top Layer w30: R34.2 C24.1
NetC25_2: C25.2 R35.2 R36.1 U5.6 | length 459.1
  Top Layer w25: R35.2 C25.2 5219.5,4222.5 5219.5,4030.5 5240,4010 U5.6 R36.1
NetC27_1: C27.1 U5.5 | length 162.5
  Top Layer w25: C27.1 5217,3942 5235,3960 U5.5
NetC29_2: C29.2 R37.2 R38.1 U6.6 | length 468.9
  Top Layer w25: R37.2 C29.2 5220,3497.16 5219.5,3496.66 5219.5,3408.34 5220,3407.84 5220,3400 5243,3377 U6.6 R38.1
NetC31_1: C31.1 U6.5 | length 163.8
  Top Layer w25: C31.1 5217,3301 5243,3327 U6.5
NetC33_1: C33.1 R39.1 R43.2 U7.2 | length 664.8
  Top Layer w25: R43.2 4924.71,2518.29 ccw(c4995.42,2589) 4995.42,2489 5041.58,2489 cw(c5041.58,2389) 5112.29,2459.71 5131.54,2440.46 cw(c5070.09,2379) R39.1 C33.1 5157,2152 5135,2130 U7.2
NetC33_2: C33.2 R39.2 R40.1 U7.6 | length 458
  Top Layer w25: R39.2 C33.2 5221,2201.16 5219.5,2199.66 5219.5,2111.34 5221,2109.84 5221,2106 5247,2080 U7.6 R40.1
NetC35_1: C35.1 U7.5 | length 166.2
  Top Layer w25: C35.1 5221,2015 5236,2030 U7.5
NetC37_1: C37.1 R41.1 R44.2 U8.2 | length 462
  Top Layer w25: R44.2 5010.71,2792.29 ccw(c5081.42,2863) 5081.42,2763 U8.2 5135,2763 5157,2785 C37.1 R41.1
NetC37_2: C37.2 R41.2 R42.1 U8.6 | length 468.5
  Top Layer w25: R41.2 C37.2 5221,2834.16 5219.5,2832.66 5219.5,2744.34 5221,2742.84 5221,2733 5241,2713 U8.6 ; U8.6@5282,2712 R42.1
NetC39_1: C39.1 U8.5 | length 169.6
  Top Layer w25: C39.1 5217,2635 5245,2663 U8.5
NetC41_2: C41.2 U1.6 | length 83.6
  Top Layer w12: C41.2 cw(c4076.7,3040.3) 4076.7,3079.47 U1.6
NetI1_1: I1.1 R36.2 | length 234
  Top Layer w25: R36.2 I1.1
NetI2_1: I2.1 R40.2 | length 234
  Top Layer w30: R40.2 I2.1
NetL3_1: L3.1 PEN.3 | length 183
  Top Layer w25: PEN.3 L3.1
NetLO_1: LO.1 R6.1 R12.2 | length 308
  Top Layer w25: LO.1 R12.2 R6.1
NetQ1_1: Q1.1 R38.2 | length 234
  Top Layer w30: R38.2 Q1.1
NetQ2_1: Q2.1 R42.2 | length 234
  Top Layer w30: R42.2 Q2.1
NetR1_1: R1.1 R7.1 | length 87.1
  Top Layer w25: R7.1 3886,4013 R1.1
NetR1_2: R1.2 R13.1 U2.1 | length 405.3
  Top Layer w25: R1.2 4057,3979 U2.1 4182,3979 4200,3961 4200,3942.69 4200.32,3942.37 4200.32,3915.63 4200,3915.31 4200,3892.69 4200.32,3892.37 4200.32,3865.63 4200,3865.31 4200,3842.69 4200.32,3842.37 4200.32,3815.63 4200,3815.31 R13.1
NetR2_1: R2.1 R8.2 RF1.1 | length 298
  Top Layer w25: R2.1 R8.2 RF1.1
NetR2_2: R2.2 R14.1 U2.8 | length 177.2
  Top Layer w25: U2.8 4328,3979.51 R14.1 R2.2
NetR3_1: R3.1 R9.1 | length 80.2
  Top Layer w25: R3.1 R9.1
NetR3_2: R3.2 R15.1 U3.1 | length 385.9
  Top Layer w25: R15.1@4259.68,2362.68 4259.68,2305.37 4258.68,2304.37 4258.68,2277.63 4259.68,2276.63 4259.68,2255.37 4258.68,2254.37 4258.68,2166.68 4284.36,2141 U3.1 4392.84,2141 R3.2
NetR4_1: R4.1 R10.2 RF2.1 | length 298
  Top Layer w25: RF2.1 R10.2@4131,1813 ; R10.2 R4.1
NetR4_2: R4.2 R16.1 U3.8 | length 183.5
  Top Layer w25: R4.2 R16.1 U3.8@4131,2140.49
NetR5_1: R5.1 R11.1 | length 84.3
  Top Layer w25: R5.1 3200,2767 R11.1
NetR5_2: R5.2 R17.1 U4.1 | length 403.9
  Top Layer w25: R5.2 3231,2935 U4.1 3231,3061 3248,3078 R17.1
NetR6_2: R6.2 R18.1 U4.8 | length 201.5
  Top Layer w25: R6.2 R18.1 U4.8@3229.49,3205
NetR13_2: R13.2 R23.1 U2.5 | length 278.7
  Top Layer w25: R13.2 4264,3808 4285,3829 U2.5
  Top Layer w30: R23.1 U2.5@4326,3827.51
NetR14_2: R14.2 R24.1 U2.4 | length 1085.8
  Top Layer w25: U2.4 3882,3829 3827,3884 3827,4025 3874,4072 R14.2
  Top Layer w30: R24.1 U2.4@4138,3828
NetR15_2: R15.2 R29.1 U3.5 | length 270.7
  Top Layer w25: U3.5 4175,2291 4196,2312 R15.2
  Top Layer w30: U3.5@4137,2296.49 R29.1
NetR16_2: R16.2 R30.1 U3.4 | length 1066.5
  Top Layer w25: R16.2 4565,2039 4625,2099 4625,2229 4563,2291 U3.4
  Top Layer w30: U3.4@4321,2291.51 R30.1
NetR17_2: R17.2 R33.1 U4.5 | length 237.4
  Top Layer w25: U4.5@3381,3166 3405,3142 R17.2
  Top Layer w30: U4.5 R33.1@3531.49,3203.49
NetR18_2: R18.2 R34.1 U4.4 | length 1084.3
  Top Layer w25: R18.2 3123,2772 3191,2704 3313,2704 3381,2772 U4.4
  Top Layer w30: U4.4 R34.1@3539.49,3014.51
NetR19_1: R19.1 R20.2 R21.2 R22.1 | length 257
  Bottom Layer w25: R20.2 R22.1 R21.2 R19.1
NetR25_1: R25.1 R26.2 R27.2 R28.1 | length 254
  Bottom Layer w25: R25.1@4104,2553 R27.2 R28.1 R26.2
PH10: P10.2 U1.31 | length 491.3
  Top Layer w12: P10.2 4036,3469 4036,3366.6 4174.79,3227.82 U1.31
PH11: P11.2 U1.32 | length 637.8
  Top Layer w12: P11.2 3940,3333 4040,3333 4155.1,3217.9 U1.32
PH12: P12.2 U1.1 | length 859.4
  Top Layer w12: P12.2 3499,3588 3909.1,3177.9 U1.1
PH13: P13.2 U1.2 | length 1106.6
  Top Layer w12: P13.2@3198,3581 3208,3581 3353,3436 3607,3436 3884.79,3158.21 U1.2
PH20: P20.2 U1.10 | length 1028.3
  Top Layer w12: P20.2 3893,2349 3893,2713 4174.79,2994.79 U1.10
PH21: P21.2 U1.9 | length 803.1
  Top Layer w12: P21.2 3871,2544 3871,2717 4155.1,3001.1 U1.9
PH22: P22.2 U1.8 | length 614.3
  Top Layer w12: P22.2 3719,2652 4107.1,3040.1 U1.8
PH23: P23.2 U1.7 | length 505.3
  Top Layer w12: P23.2 3822,2934 3969,2934 4094.79,3059.79 U1.7
Q1PO: C29.1 R37.1 R45.1 U1.23 U6.2 | length 1407.9
  Top Layer w12: U1.23 4683.79,3158.21 ; R45.1 ccw(c4861.86,3102.86) 4861.86,3158.21 4683.79,3158.21 ; U6.2 5035.42,3427 ccw(c5035.42,3327) 4964.71,3397.71 4754.5,3187.5 cw(c4683.79,3258.21) 4683.79,3158.21
  Top Layer w25: U6.2 5135,3427 5156,3448 5156,3457.84 5156.5,3458.34 5156.5,3495.66 5156,3496.16 C29.1 R37.1
Q2PO: R44.1 R45.2 U1.18 | length 875
  Top Layer w12: U1.18 4701.79,3059.79 ; R45.2 cw(c4857.03,3121.97) 4857.03,3059.79 4701.79,3059.79 ; R44.1 4772.5,3030.5 ccw(c4701.79,2959.79) 4701.79,3059.79
RF1N: C7.2 R21.1 U1.28 | length 353.9
  Top Layer w12: U1.28 4233.84,3331.42 cw(c4333.84,3331.42) 4263.13,3402.13 C7.2
  Bottom Layer w25: R21.1 4272,3505 v2(4312,3465)
RF1P: C8.2 R22.2 U1.29 | length 345.2
  Top Layer w12: C8.2 4184.87,3418.13 cw(c4114.16,3347.42) 4214.16,3347.42 U1.29
  Bottom Layer w25: v2(4153,3465) 4153,3472 R22.2
RF2N: C15.2 R27.1 R80.1 R80.2 U1.13 | length 394.1
  Top Layer w12: C15.2 cw(c4207.9,2649) 4157.77,2699.14 R80.1 ; U1.13 4233.84,2814.65 ccw(c4278.02,2814.65) R80.2
  Bottom Layer w25: v2(4153,2649) R27.1
RF2P: C16.2 R28.2 U1.12 | length 449.9
  Top Layer w12: U1.12 4214.16,2797.26 ccw(c4314.16,2797.26) 4243.45,2726.55 C16.2
  Bottom Layer w25: R28.2 4276,2619 v2(4306,2649)
RSET: KEY1.2 R47.2 U1.15 | length 656
  Top Layer w12: U1.15 4273.21,2991.79 4349,2916 4349,2848 4399,2798
  Top Layer w25: 4399,2798 4463,2734 KEY1.2@4463,2693
  Top Layer w50: KEY1.2@4463,2437.09 KEY1.2@4463,2693
pads on no net: U1.16 U1.19 U1.22 U1.25

## Polygon pours and split planes (outlines as drawn)
GND on Bottom Layer "Top Layer-No Net" (solid, pour order 6): 2555,4630 5795,4630 5795,1485 2555,1485
GND on Top Layer "Top Layer-No Net" (solid, pour order 8): 2555,1485 5795,1485 5795,4630 2555,4630

## Keep-outs
Keep-Out Layer:
  the board outline again, w10

## Other copper
Top Layer:
  rectangle net RF2N: 4180,2728 4188,2743
  rectangle net RF2N: 4185,2722 4200,2728
  rectangle net RF2N: 4228,2786 4238,2811
  region net RF2N: 4239,2796 4246,2803 4238,2811 4231,2804
  region net 4LON: 3907.5,3086.5 3918.7,3097.7 3914.2,3102.2 3903,3091
  rectangle net 4LON: 3897,3099.16 3917.25,3105
  rectangle net RF2N: 4143,2661 4152,2690
  region net RF2N: 4127,2656 4141,2670 4136,2675 4122,2661
  region net NetC33_2: 5382,2065 5383.5,2066.5 5376,2074 5374.5,2072.5
  region net NetC33_2: 5376.5,2085.5 5384,2093 5382,2095 5374.5,2087.5
  region net -5VS: 5080,1913 5092,1925 5071,1946 5059,1934
  region net NetI2_1: 5613,2051 5622,2060 5602,2080 5593,2071
  region net NetI2_1: 5602,2080 5622.5,2100.5 5614,2109 5593.5,2088.5
  rectangle net -5VS: 5052,2004 5068,2019
  rectangle net +5VS: 5238,2119 5324,2192
  rectangle net +5VS: 5238,2752 5324,2825
  region net -5VS: 5077,3842 5093,3858 5070,3881 5054,3865
  region net -5VS: 5084,3205 5097,3218 5066,3249 5053,3236
  region net -5VS: 5083,2534 5095.5,2546.5 5062,2580 5049.5,2567.5
  region net NetC37_2: 5382,2697 5384.5,2699.5 5375,2709 5372.5,2706.5
  region net NetC37_2: 5374,2716 5383.5,2725.5 5382,2727 5372.5,2717.5
  region net NetQ2_1: 5614,2683 5623.5,2692.5 5603,2713 5593.5,2703.5
  region net NetQ2_1: 5602,2702 5627.5,2727.5 5614,2741 5588.5,2715.5
  rectangle net -5VS: 5052,2635 5072,2652
  rectangle net -5VS: 5052,3294 5076,3316
  region net NetQ1_1: 5613,3347 5625.5,3359.5 5602,3383 5589.5,3370.5
  region net NetQ1_1: 5603,3374 5624,3395 5613,3406 5592,3385
  region net NetC29_2: 5382,3362 5385,3365 5378,3372 5375,3369
  region net NetC29_2: 5379,3385 5384,3390 5382,3392 5377,3387
  rectangle net +5VS: 5238,3416 5324,3489
  rectangle net +5VS: 5238,4049 5324,4122
  rectangle net -5VS: 5052,3934 5068,3949
  region net NetI1_1: 5613,3980 5625,3992 5604,4013 5592,4001
  region net NetI1_1: 5603,4000 5627.5,4024.5 5613,4039 5588.5,4014.5
  region net NetI1_1: 5470,3995 5476.5,4001.5 5474,4004 5467.5,3997.5
  region net NetI1_1: 5476,4015 5478,4017 5470,4025 5468,4023
  region net NetC25_2: 5382,3995 5383.5,3996.5 5377.5,4002.5 5376,4001
  region net NetC25_2: 5376,4017 5383,4024 5382,4025 5375,4018
  region net NetR16_2: 4339,2294 4349,2304 4328,2325 4318,2315
  region net NetR16_2: 4303,2293 4329,2319 4318,2330 4292,2304
  region net NetR15_2: 4112.5,2293.5 4141.5,2322.5 4131,2333 4102,2304
  region net NetR15_2: 4152.5,2296.5 4160,2304 4141.5,2322.5 4134,2315
  region net NetR2_1: 4328,4411 4339,4422 4310,4451 4299,4440
  region net NetR2_1: 4334,4417 4357,4440 4346,4451 4323,4428
  region net NetR2_1: 4314.5,4230.5 4320,4236 4318.5,4237.5 4313,4232
  region net NetR2_1: 4342,4231 4343,4232 4339,4236 4338,4235
  region net NetR2_2: 4318.5,4138.5 4320,4140 4314.5,4145.5 4313,4144
  region net NetR2_2: 4339.5,4140.5 4343,4144 4341.5,4145.5 4338,4142
  region net NetR2_2: 4312.5,3977.5 4337,4002 4322.5,4016.5 4298,3992
  region net NetR2_2: 4346,3981 4357,3992 4333,4016 4322,4005
  region net NetR14_2: 4129,3796 4138,3805 4118,3825 4109,3816
  region net NetR14_2: 4150,3796 4170,3816 4157,3829 4137,3809
  region net NetR13_2: 4324,3790 4339,3805 4313,3831 4298,3816
  region net NetR13_2: 4330,3787 4359,3816 4347,3828 4318,3799
  region net NetR4_2: 4139.5,2103.5 4164,2128 4145.5,2146.5 4121,2122
  region net NetR4_2: 4120.5,2107.5 4132,2119 4111.5,2139.5 4100,2128
  region net NetR4_2: 4144,1967 4146,1969 4140.5,1974.5 4138.5,1972.5
  region net NetR4_2: 4117.5,1967.5 4123,1973 4121.5,1974.5 4116,1969
  region net NetR4_1: 4150,1662 4160,1672 4132,1700 4122,1690
  region net NetR4_1: 4112.5,1661.5 4139,1688 4128.5,1698.5 4102,1672
  region net NetR4_1: 4120.5,1876.5 4122,1878 4117.5,1882.5 4116,1881
  region net NetR4_1: 4141.5,1876.5 4146,1881 4144.5,1882.5 4140,1878
  region net NetR6_2: 3040,3190 3044.5,3194.5 3043,3196 3038.5,3191.5
  region net NetR6_2: 3045,3212 3046.5,3213.5 3040,3220 3038.5,3218.5
  region net NetLO_1: 2951,3190 2953.5,3192.5 2946,3200 2943.5,3197.5
  region net NetLO_1: 2947,3212 2953.5,3218.5 2952,3220 2945.5,3213.5
  region net NetR18_2: 3393.5,2982.5 3415,3004 3402.5,3016.5 3381,2995
  region net NetR18_2: 3405,3014 3417,3026 3388.5,3054.5 3376.5,3042.5
  region net NetR17_2: 3400,3205 3412,3217 3392.5,3236.5 3380.5,3224.5
  region net NetR17_2: 3390.5,3169.5 3418,3197 3405,3210 3377.5,3182.5
  region net NetR6_2: 3220,3173 3231,3184 3205.5,3209.5 3194.5,3198.5
  region net NetR6_2: 3206,3202 3229.5,3225.5 3219,3236 3195.5,3212.5
  region net NetLO_1: 2734,3176 2752,3194 2741,3205 2723,3187
  region net NetLO_1: 2745,3205 2754,3214 2734,3234 2725,3225
  rectangle net I2PO: 4812,2610 4823,2627
  rectangle net I2PO: 4812,2628 4827,2637
  rectangle net Q2PO: 4901,2881 4908,2896
  rectangle net Q2PO: 4908,2896 4922,2902
  region net I1PO: 4786.38,3376.55 4810,3395 4802.62,3404.45 4779,3386
  region net I1PO: 4806,3415 4810,3419 4801,3428 4797,3424
  region net I1PO: 4786,3413 4801,3428 4795,3434 4780,3419
  region net I1PO: 5049,4058 5057,4066 5052,4071 5044,4063
  region net I1PO: 5052,4049 5055,4052 5049,4058 5046,4055
  region net Q1PO: 5050,3425 5057.5,3432.5 5052,3438 5044.5,3430.5
  region net Q1PO: 5052,3416 5055.5,3419.5 5044.5,3430.5 5041,3427
Bottom Layer:
  rectangle net +5V: 3946,3446 3973,3493
  rectangle net -5V: 2840,2546 3088,2644
  rectangle net -5V: 2840,2589 3283,2660
  rectangle net +5V: 2841,2024 3788,2120
  region net -5V: 4416,3873 4438,3895 4423,3910 4401,3888
  region net -5V: 4423,3847 4432.5,3856.5 4410.5,3878.5 4401,3869
  region net +5V: 4171,4018 4198,4045 4186,4057 4159,4030
  region net +5V: 4160,4021 4172,4033 4148,4057 4136,4045
  rectangle net +5V: 4315,2245 4331,2261
  rectangle net +5V: 4321,2256 4350,2283
  region net +5V: 4317,2155 4347,2185 4339,2193 4309,2163
  region net +5V: 4355,2149 4369,2163 4347,2185 4333,2171
  region net -5V: 4047,2232 4060.5,2245.5 4033,2273 4019.5,2259.5
  region net -5V: 4032,2211 4053.5,2232.5 4043,2243 4021.5,2221.5
  region net +5V: 4331.5,2214.5 4340,2223 4320.5,2242.5 4312,2234
  region net -5V: 3323.5,3291.5 3338,3306 3314.5,3329.5 3300,3315
  region net -5V: 3334,3288 3361,3315 3348,3328 3321,3301
  region net +5V: 3257,3013 3276,3032 3261,3047 3242,3028
  region net +5V: 3267,3040 3280,3053 3257,3076 3244,3063
  region net +5V: 3335,3034 3361,3060 3341,3080 3315,3054
  region net 4LON: 3652,3144 3663.5,3155.5 3634,3185 3622.5,3173.5
  region net 4LOP: 3633,3033 3659,3059 3643,3075 3617,3049
  region net +5V: 3535,3057 3569,3091 3556,3104 3522,3070
  region net -5V: 4470.5,3985.5 4507,4022 4486.5,4042.5 4450,4006
  region net +5V: 4635,2028 4672,2065 4653,2084 4616,2047
  rectangle net +5V: 3321,2103 3356,2154
  region net +5V: 3379,2086 3407,2114 3350,2171 3322,2143
  region net -5V: 2927,2623 2940.5,2636.5 2879,2698 2865.5,2684.5
  region net +5V: 3804.5,2025.5 3818.5,2039.5 3779,2079 3765,2065

## Silkscreen, mask and mechanical layers (free items; w line width, h text height)
Top Overlay:
  lines w10: 3145,3776 3145,3842 3969,3842 3969,3776 3147,3776 ; 3318,3842 3319,3842 3319,3776 ; 3416,2727 3528,2727 ; 3526,2281 3414,2281 3414,2504 3526,2504 ; 3530,2882 3526,2882 ; 3564,3842 3564,3776 3566,3776 ; 3801,3842 3801,3776 3805,3776 ; 3526,2882 3414,2882 3414,2128 3526,2128 3526,2882

## Text inside footprints (layer, text, board x,y; h text height)
U1: Top Overlay "*" at 4074,3183 h30
U5: Top Overlay "*" at 5078,4157 h30
U6: Top Overlay "*" at 5082,3526 h30
U7: Top Overlay "*" at 5075,2229 h30
U8: Top Overlay "*" at 5080,2862 h30